# EAGLE board nike_relay (EAGLE 6.5.0)
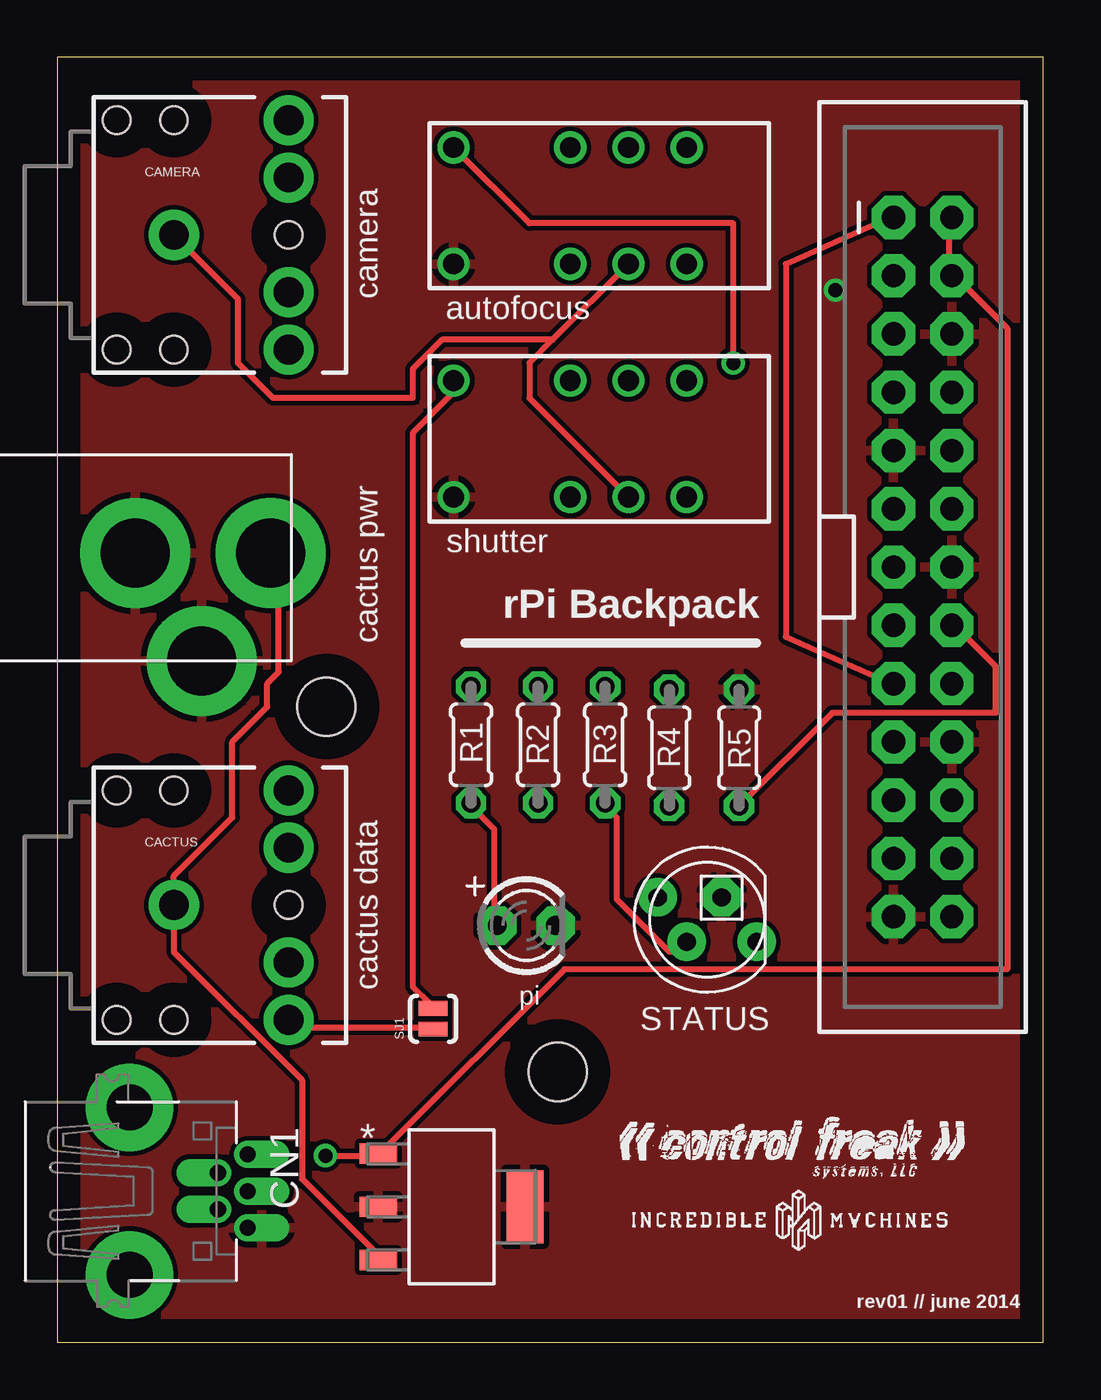
[diagram p0: board, top side]
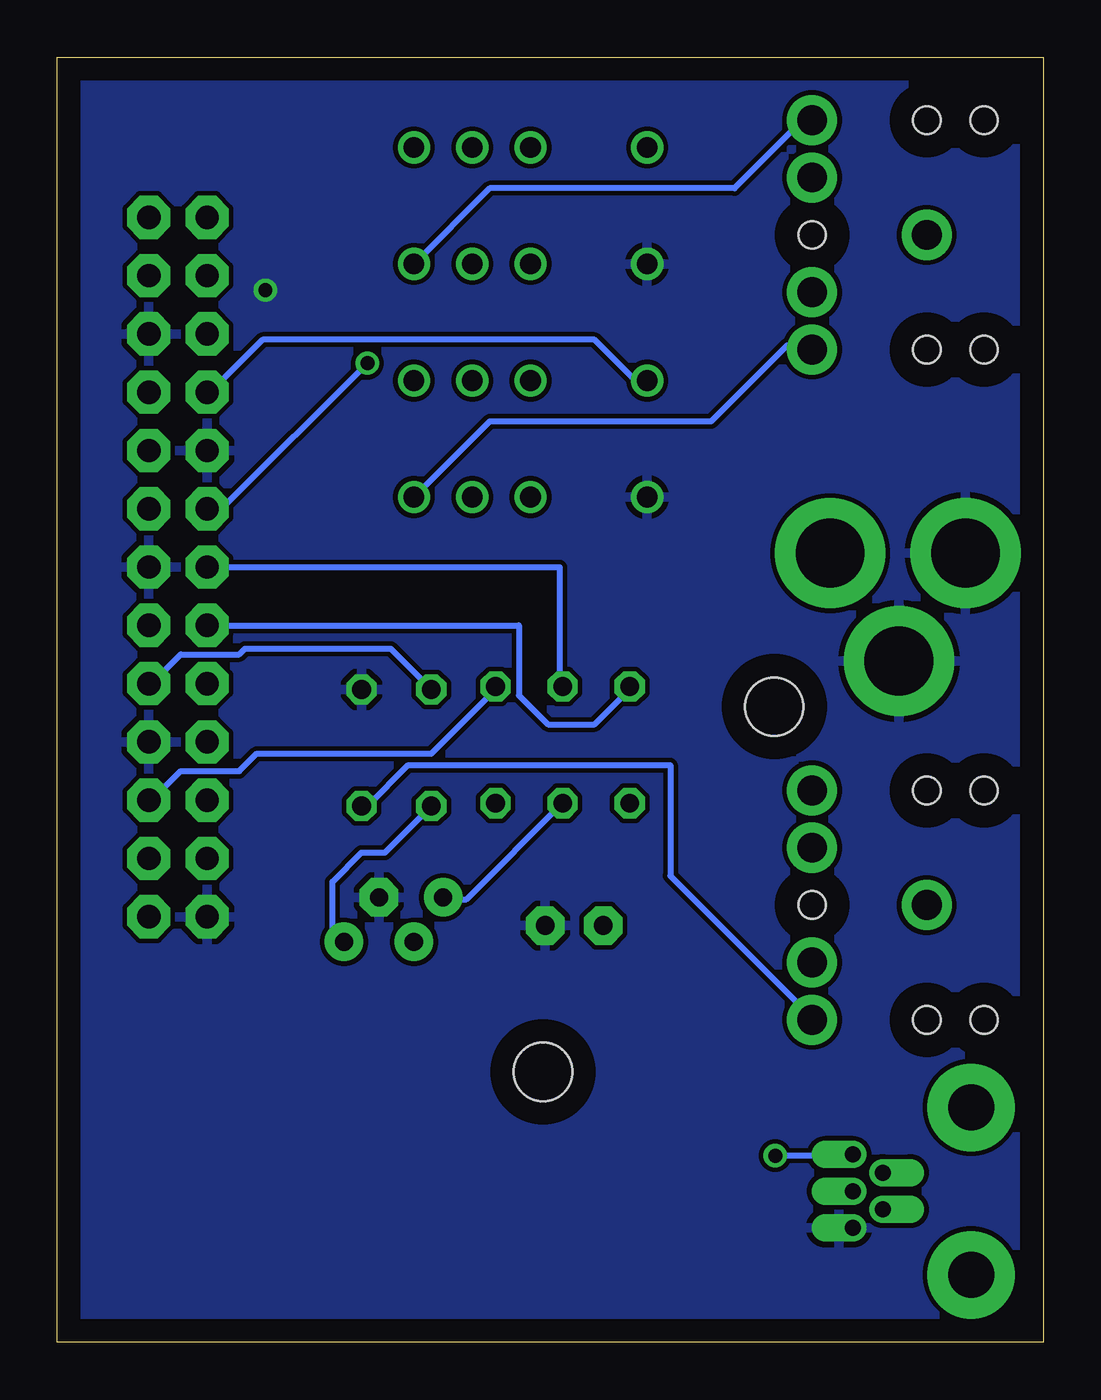
[diagram p1: board, bottom side, seen from below]

Size 42.98 x 56 mm. Coordinates in mm from the lower left corner, seen from the top.
Outline: 0,0 42.98,0 42.98,56 0,56 0,0
Copper layers (1*16): Top 0.035mm / dielectric 1.5mm / Bottom 0.035mm
Design rules "default": minimum track width 10mil, minimum drill 24mil, track to track 8mil, track to pad 8mil, pad to pad 8mil, via to via 8mil, smd to smd 8mil, copper to edge 40mil, drill to drill 8mil, minimum pad ring 10mil, minimum via ring 8mil, stop-mask expansion 4mil, vias tented up to drill 0mil, thermal gap 10mil
Net classes: 1 VCC: width 0.381 mm
Holes 2.54 mm at 11.73,27.7 21.81,11.78

## Footprints (pad centres in the part's own frame; a part is rotated, then mirrored left to right if it is on the bottom)
HX = drill 0.9: 1 -6.35,-2.54; 3 -1.27,-2.54; 4 1.27,-2.54; 5 3.81,-2.54; 8 3.81,2.54; 9 1.27,2.54; 10 -1.27,2.54; 12 -6.35,2.54
AUDIO-JACK = drill 1.3 pad 2.184: RING 5,5; RSH 5,2.5; SLEEVE 0,0; TIP 5,-5; TSH 5,-2.5 | hole 1.2: 0,5; -2.5,5; -2.5,-5; 0,-5; 5,0
PJ-102A = drill 3 pad 4.8: RING 0.1,-3.39; RING_SW -4.6,-6.29; TIP 0.1,-9.29
USB-MINIB-THM-MOLEX = drill 0.7 offset: D+ 0,9.72; D- -0.8,8.42; GND 1.6,9.72; ID 0.8,8.42; VBUS -1.6,9.72 | drill 2 pad 3.81: GND1 -3.65,4.57; GND4 3.65,4.57
2X13-SHROUDED = drill 1.016 pad 1.88 octagon: 1 -1.27,15.24; 2 1.27,15.24; 3 -1.27,12.7; 4 1.27,12.7; 5 -1.27,10.16; 6 1.27,10.16; 7 -1.27,7.62; 8 1.27,7.62; 9 -1.27,5.08; 10 1.27,5.08; 11 -1.27,2.54; 12 1.27,2.54; 13 -1.27,0; 14 1.27,0; 15 -1.27,-2.54; 16 1.27,-2.54; 17 -1.27,-5.08; 18 1.27,-5.08; 19 -1.27,-7.62; 20 1.27,-7.62; 21 -1.27,-10.16; 22 1.27,-10.16; 23 -1.27,-12.7; 24 1.27,-12.7; 25 -1.27,-15.24; 26 1.27,-15.24
LED3MM = drill 0.813 pad 1.676 octagon: A -1.27,0; K 1.27,0
0204/5 = drill 0.813 octagon: 1 -2.54,0; 2 2.54,0
SJ_2S-NO = smd 0.635 x 1.27: 1 -0.45,0; 2 0.45,0
LED5MMRGB = drill 0.8 pad 1.676: 1 -2.159,0.968; 3 0.889,0.968; 4 2.159,-0.968 | drill 0.8 pad 1.676 octagon: 2 -0.635,-0.968
SOT230P700X180-4N = smd 1.626 x 0.889: 1 -3.2,2.311; 2 -3.2,0; 3 -3.2,-2.311 | smd 1.626 x 3.175: 4 3.2,0

## Placement (x,y rotation side)
AF_RELAY  HX2-3V  [HX]  23.62,49.53 0 top
CACTUS  [AUDIO-JACK]  5.08,19.05 0 top
CACTUS_PWR  2.1MMJACKTHM  [PJ-102A]  0,34.29 90 top
CAMERA  [AUDIO-JACK]  5.08,48.26 0 top
CN1  [USB-MINIB-THM-MOLEX]  -1.42,6.58 270 top
JP1  RASPBERRYPI-GPIOPTH  [2X13-SHROUDED]  37.72,33.78 0 top
LED1  [LED3MM]  20.45,18.16 0 top
R1  [0204/5]  18.03,26.04 270 top
R2  [0204/5]  20.95,26.04 90 top
R3  [0204/5]  23.88,26.04 90 top
R4  [0204/5]  26.67,25.91 90 top
R5  10k  [0204/5]  29.72,25.91 270 top
SHUTTER_RELAY  HX2-3V  [HX]  23.62,39.37 0 top
SJ1  SOLDERJUMPER-OLDNO  [SJ_2S-NO]  16.38,14.1 90 top
STATUS  RGBLED_CA-5MM  [LED5MMRGB]  28.32,18.41 180 top
U1  MCP1703-3302E/DB  [SOT230P700X180-4N]  17.19,5.9 0 top

## Library data of the parts
AF_RELAY SHUTTER_RELAY = relay; OC_FARNELL: unknown; OC_NEWARK: unknown
CACTUS CAMERA = SparkFun-Connectors
CACTUS_PWR CN1 LED1 STATUS = adafruit
JP1 = SparkFun-Boards; DIST: sparkfun; DIST_ID: PRT-11490
R1-R5 = resistor
SJ1 = SparkFun-Retired
U1 = Microchip_By_element14_Batch_1; MPN: MCP1703-3302E/DB; OC_FARNELL: 1627177; OC_NEWARK: 40M0623; PACKAGE: SOT-223-3; SUPPLIER: Microchip

## Nets
3.3V: JP1.1 JP1.17
5VRAW: CN1.VBUS JP1.2 JP1.4 U1.1
CACT_RING: CACTUS.RING
CACTUS_3V3: CACTUS.SLEEVE CACTUS_PWR.TIP U1.3
CACTUS_TRIP: CACTUS.TIP JP1.16 R5.2 SJ1.1
CAM_AF: AF_RELAY.12 JP1.11
CAM_RING: AF_RELAY.5 CAMERA.RING
CAM_SHUTTER: JP1.7 SHUTTER_RELAY.12 SJ1.2
CAM_SLEEVE: AF_RELAY.4 CAMERA.SLEEVE SHUTTER_RELAY.4
CAM_TIP: CAMERA.TIP SHUTTER_RELAY.5
GND: AF_RELAY.1 CACTUS_PWR.RING CACTUS_PWR.RING_SW CN1.GND JP1.6 JP1.9 JP1.14 JP1.20 JP1.25 LED1.K R5.1 SHUTTER_RELAY.1 STATUS.2 U1.2 U1.4
LED_BLUE: JP1.13 R2.2
LED_GRN: JP1.22 R3.2
LED_RED: JP1.18 R4.2
N$1: R2.1 STATUS.4
N$2: R3.1 STATUS.3
N$3: R4.1 STATUS.1
N$4: JP1.15 R1.1
N$5: LED1.A R1.2

## Tracks (layer width: path | path; a pad name or v marks a point on that pad's centre or on a via)
3.3V
  Top 0.254: JP1.17 36.32,28.7 31.75,30.73 31.75,46.99 36.32,49.02 JP1.1
5VRAW  (via drill 0.61)
  Top 0.254: JP1.2 38.86,49.02 38.86,46.48 JP1.4 39.12,46.48 41.4,44.2 41.4,16.26 22.1,16.26 14.22,8.38 U1.1 13.97,8.13 v11.68,8.13
  Bottom 0.254: v11.68,8.13 8.38,8.13 CN1.VBUS
CACTUS_3V3
  Top 0.254: CACTUS_PWR.TIP 9.4,34.29 9.65,34.04 9.65,29.21 9.14,28.7 9.14,27.69 7.62,26.16 7.62,22.86 5.08,20.32 CACTUS.SLEEVE 5.08,17.02 10.67,11.43 10.67,7.11 13.97,3.81 U1.3
CACTUS_TRIP
  Top 0.254: SJ1.1 16.26,13.72 10.16,13.72 10.16,13.97 CACTUS.TIP | R5.2 33.78,27.43 40.89,27.43 40.89,29.46 39.12,31.24 JP1.16
  Bottom 0.254: R5.2 29.46,23.37 27.69,25.15 16.26,25.15 16.26,20.32 10.16,14.22 CACTUS.TIP
CAM_AF  (via drill 0.61)
  Top 0.254: AF_RELAY.12 20.57,48.77 29.46,48.77 v29.46,42.67
  Bottom 0.254: v29.46,42.67 35.81,36.32 JP1.11
CAM_RING
  Bottom 0.254: AF_RELAY.5 24.13,50.29 13.46,50.29 10.67,53.09 10.16,53.09 CAMERA.RING
CAM_SHUTTER
  Top 0.254: SHUTTER_RELAY.12 17.27,41.4 15.49,39.62 15.49,15.49 16.26,14.73 SJ1.2
  Bottom 0.254: SHUTTER_RELAY.12 17.78,41.91 19.56,43.69 34.04,43.69 36.32,41.4 JP1.7
CAM_SLEEVE
  Top 0.254: SHUTTER_RELAY.4 20.57,41.15 20.57,42.67 21.59,43.69 | AF_RELAY.4 21.59,43.69 | CAMERA.SLEEVE 7.87,45.47 7.87,42.67 9.4,41.15 15.49,41.15 15.49,42.42 16.76,43.69 21.59,43.69
CAM_TIP
  Bottom 0.254: SHUTTER_RELAY.5 24.13,40.13 14.48,40.13 11.18,43.43 10.16,43.43 CAMERA.TIP
GND  (via drill 0.6)
  other vias: 33.91,45.85
  pour Bottom: -8.89,62.23 111.76,62.23 111.76,-3.81 -8.89,-2.54
  pour Top: -6.35,57.15 113.03,57.15 113.03,-5.08 -6.35,-5.08
LED_BLUE
  Bottom 0.254: JP1.13 21.08,33.78 21.08,28.7 R2.2
LED_GRN
  Bottom 0.254: R3.2 23.88,28.45 26.67,25.65 34.29,25.65 35.05,24.89 37.59,24.89 38.86,23.62 JP1.22
LED_RED
  Bottom 0.254: R4.2 28.45,30.23 34.8,30.23 35.05,29.97 37.59,29.97 38.86,28.7 JP1.18
N$1
  Bottom 0.254: R2.1 25.15,19.3 26.16,19.3 STATUS.4
N$2
  Top 0.254: STATUS.3 27.43,17.02 26.67,17.02 24.38,19.3 24.38,22.86 23.88,23.37 R3.1
N$3
  Bottom 0.254: R4.1 28.7,21.34 29.72,21.34 30.99,20.07 30.99,17.53 30.48,17.53 STATUS.1
N$4
  Bottom 0.254: JP1.15 22.86,31.24 22.86,28.19 21.59,26.92 19.56,26.92 18.03,28.45 R1.1
N$5
  Top 0.254: R1.2 18.03,23.37 19.05,22.35 19.05,18.29 LED1.A

## Text on the board
tPlace: camera | autofocus | shutter | cactus pwr | rPi Backpack | cactus data | pi | rev01 // june 2014